# Altium PCB УШЯИ 758723.275.PcbDoc
Units mm, origin at the board's own origin, x right, y up, seen from the top; angles counter-clockwise.
Board outline 220 x 50 mm, 2 copper layers (Top Layer, Top, Bottom Layer, Bottom), stack 1.571 mm thick; 59 components, 42 nets, 232 pads, 44 vias.
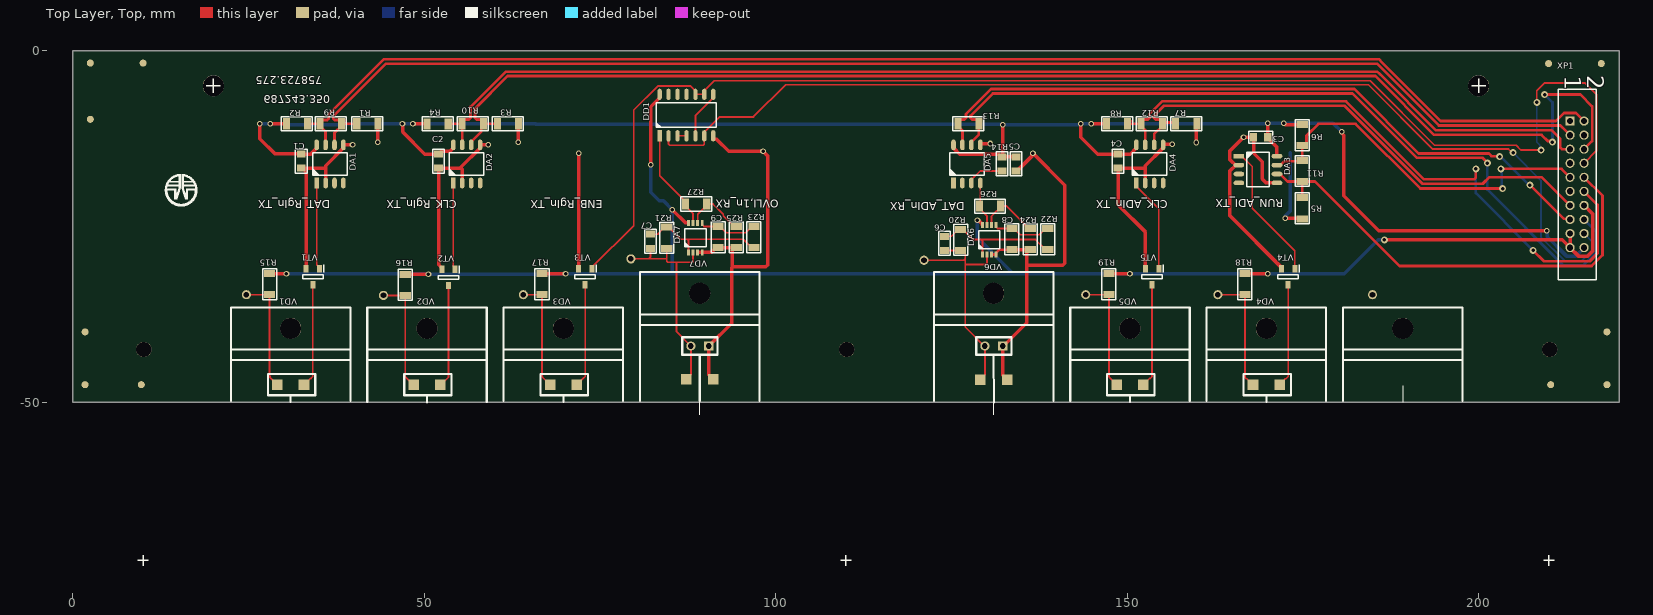
[diagram p0: Top Layer, Top view]
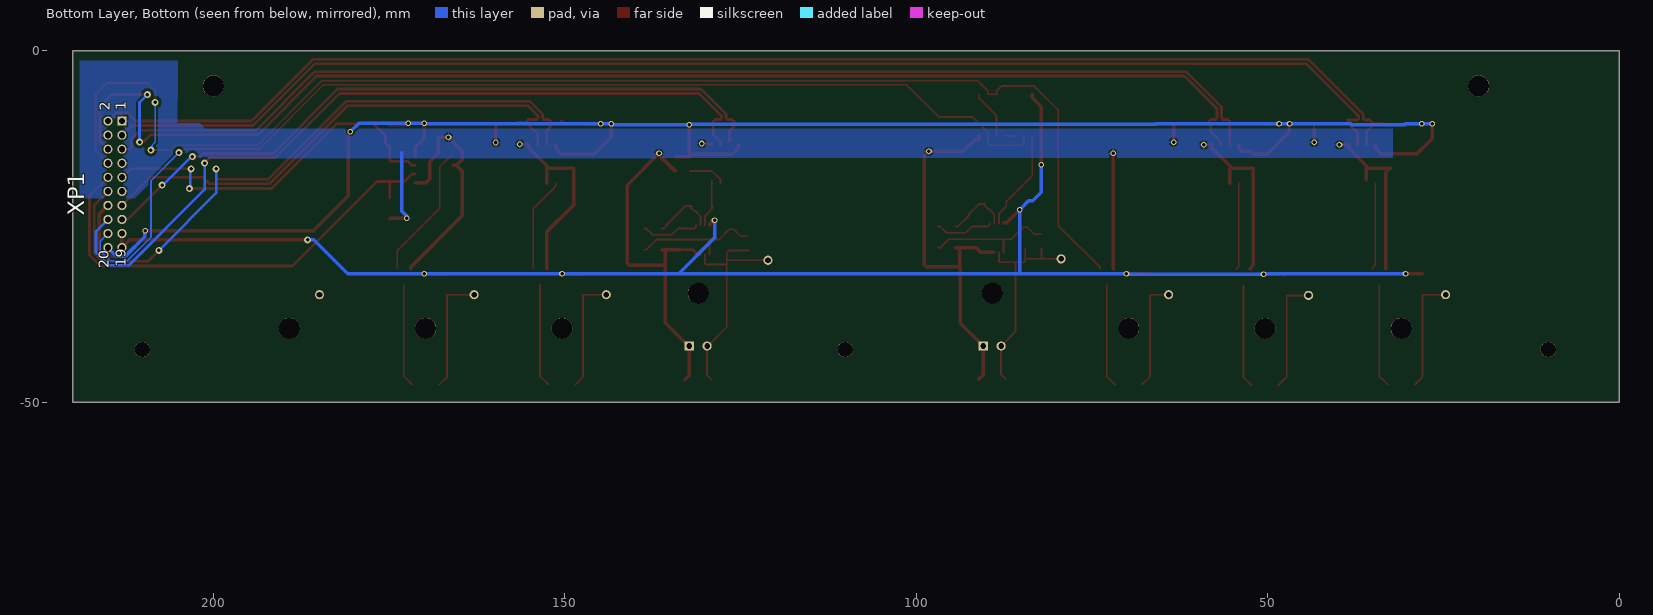
[diagram p1: Bottom Layer, Bottom view, seen from below]
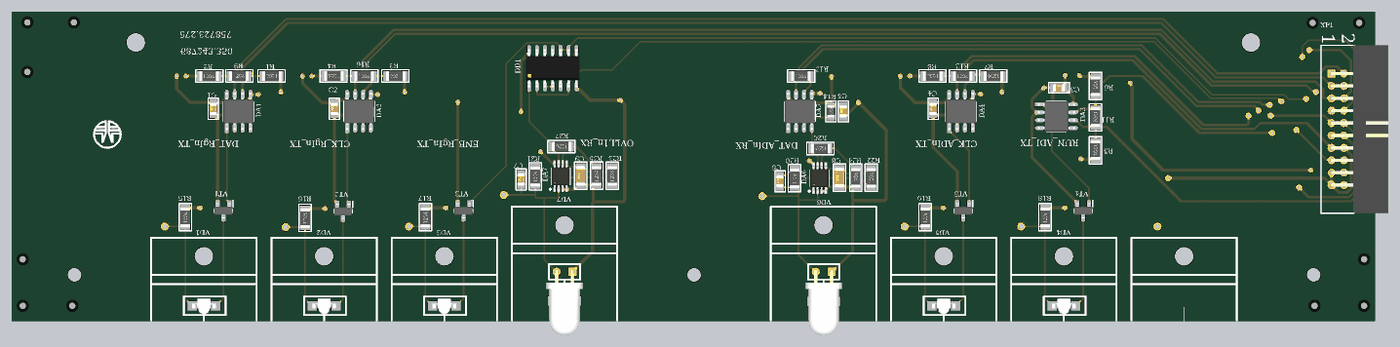
[diagram p2: 3D render of the assembled board from above, using the file's embedded part models]

## Layer stack, top to bottom
Top Solder, Top Mask: solder mask 0.0102, Solder Resist, Dk 3.5
Top Layer, Top: signal copper 0.0356
Dielectric 1: dielectric 1.5, FR-4, Dk 4.8
Bottom Layer, Bottom: signal copper 0.0356
Bottom Solder, Bot Mask: solder mask 0.0102, Solder Resist, Dk 3.5

## Board outline
0,-50 0,0 220,0 220,-50

## Design rules (kind name [scope] priority, off if disabled: settings)
Clearance [All] p1: gap=0.15 ignorepadtopadclearanceinfootprint=FALSE except(0.2: Arc-Via Track-Via)
DiffPairsRouting [All] p1: maxlimit=0.254 minlimit=0.254 mostfreqgap=0.254 toplayer_minwidth=0.381 toplayer_maxwidth=0.381 toplayer_prefwidth=0.381 bottomlayer_minwidth=0.381 bottomlayer_maxwidth=0.381 bottomlayer_prefwidth=0.381 maxuncoupledlength=12.7
HoleSize [All] p1: absolutevalues=TRUE maxlimit=8 minlimit=0.25 maxpercent=80.000 minpercent=20.000
HoleToHoleClearance [All] p1: gap=0.2 allowstackedmicrovias=TRUE
MinimumSolderMaskSliver [All] p1: minsoldermaskwidth=0.001
NetAntennae [All] p1: netantennaetolerance=2
PlaneClearance [All] p1: clearance=0.254
PolygonConnect [All] p1: connectstyle=Relief reliefconductorwidth=0.254 reliefentries=4 polygonreliefangle="90 Angle" airgapwidth=0.254
RoutingVias [All] p1: holewidth=0.5 width=0.8 viastyle="Through Hole" minholewidth=0.5 minwidth=0.8 maxholewidth=0.5 maxwidth=2
ShortCircuit [All] p1: allowed=TRUE
SilkToSilkClearance [All] p1: silktosilkclearance=0.1
SilkToSolderMaskClearance [IsPad] p1: minsilkscreentomaskgap=0.1 clearancetoexposedcopper=TRUE
SolderMaskExpansion [All] p1: expansion=0.102 istentingtop=FALSE
UnConnectedPin [All] p1:
UnRoutedNet [All] p1: checkbadconnections=TRUE
Width [All] p1: maxlimit=5 minlimit=0.15 preferedwidth=0.3 minimp=50.000000 maximp=50.000000 favimp=50.000000
20 further rules are at their usual default settings.

## Classes and differential pairs
net class R19_Nets: +5Vn NetR19_1
net class R18_Nets: +5Vn NetR18_1
net class R17_Nets: +5Vn NetR17_1
net class R16_Nets: +5Vn NetR16_1
net class R15_Nets: +5Vn NetR15_1
net class R6_Nets: +3.3Vn RUN_ADI_n
net class R5_Nets: GNDn RUN_ADI_p
net class R4_Nets: +3.3Vn CLK_RgI_n
net class R3_Nets: CLK_RgI_p GNDn
net class R2_Nets: +3.3Vn DAT_RgI_n
net class R1_Nets: DAT_RgI_p GNDn
net class VT5_Nets: CLK_ADIn GNDn NetVD5_2
net class VT4_Nets: GNDn NetVD4_2 RUN_ADIn
net class VT3_Nets: ENB_RgIn GNDn NetVD3_2
net class VT2_Nets: CLK_RgIn GNDn NetVD2_2
net class VT1_Nets: DAT_RgIn GNDn NetVD1_2
net class VD7_Nets: GNDn NetC7_1
net class VD6_Nets: GNDn NetC6_1
net class VD5_Nets: NetR19_1 NetVD5_2
net class VD4_Nets: NetR18_1 NetVD4_2
net class VD3_Nets: NetR17_1 NetVD3_2
net class VD2_Nets: NetR16_1 NetVD2_2
net class VD1_Nets: NetR15_1 NetVD1_2
net class R27_Nets: NetDA7_6 NetDA7_7
net class R26_Nets: DAT_ADIn NetDA6_6
net class R25_Nets: GNDn NetDA7_6
net class R24_Nets: GNDn NetDA6_6
net class R23_Nets: NetC7_2 NetC9_2
net class R22_Nets: NetC6_2 NetC8_2
net class R21_Nets: NetC7_1 NetC7_2
net class R20_Nets: NetC6_1 NetC6_2
net class R8_Nets: +3.3Vn CLK_ADI_n
net class R7_Nets: CLK_ADI_p GNDn
net class DA7_Nets: +5Vn GNDn NetC7_1 NetC7_2 NetC9_2 NetDA7_6 NetDA7_7
net class C9_Nets: GNDn NetC9_2
net class C8_Nets: GNDn NetC8_2
net class C7_Nets: NetC7_1 NetC7_2
net class C6_Nets: NetC6_1 NetC6_2
net class DA6_Nets: +5Vn DAT_ADIn GNDn NetC6_1 NetC6_2 NetC8_2 NetDA6_2_4 NetDA6_6
net class XP1_Nets: +3.3Vn +5Vn CLK_ADI_n CLK_ADI_p CLK_RgI_n CLK_RgI_p DAT_ADI_n DAT_ADI_p DAT_RgI_n DAT_RgI_p ENB_RgIn GNDn OVLI,1n RUN_ADI_n RUN_ADI_p
net class R14_Nets: +3.3Vn NetDA5_3
net class R13_Nets: DAT_ADI_n DAT_ADI_p
net class R12_Nets: CLK_ADI_n CLK_ADI_p
net class R11_Nets: RUN_ADI_n RUN_ADI_p
net class R10_Nets: CLK_RgI_n CLK_RgI_p
net class R9_Nets: DAT_RgI_n DAT_RgI_p
net class DD1_Nets: +5Vn ENB_RgIn GNDn NetDA7_7 NetDD1_3 NetDD1_5 NetDD1_7 NetDD1_8 NetDD1_10 NetDD1_11 NetDD1_12 NetDD1_13 NetDD1_14 OVLI,1n
net class DA5_Nets: +3.3Vn DAT_ADI_n DAT_ADI_p DAT_ADIn GNDn NetDA5_1 NetDA5_2 NetDA5_3
net class DA4_Nets: +3.3Vn CLK_ADI_n CLK_ADI_p CLK_ADIn GNDn NetDA4_3 NetDA4_4
net class DA3_Nets: +3.3Vn GNDn NetDA3_3 NetDA3_4 RUN_ADI_n RUN_ADI_p RUN_ADIn
net class DA2_Nets: +3.3Vn CLK_RgI_n CLK_RgI_p CLK_RGIn GNDn NetDA2_3 NetDA2_4
net class DA1_Nets: +3.3Vn DAT_RgI_n DAT_RgI_p DAT_RgIn GNDn NetDA1_3 NetDA1_4
net class C5_Nets: +3.3Vn GNDn
net class C4_Nets: +3.3Vn GNDn
net class C3_Nets: +3.3Vn GNDn
net class C2_Nets: +3.3Vn GNDn
net class C1_Nets: +3.3Vn GNDn
differential pair RUN_ADI: +RUN_ADI_p -RUN_ADI_n
differential pair DAT_RgI: +DAT_RgI_p -DAT_RgI_n
differential pair DAT_ADI: +DAT_ADI_p -DAT_ADI_n
differential pair CLK_RgI: +CLK_RgI_p -CLK_RgI_n
differential pair CLK_ADI: +CLK_ADI_p -CLK_ADI_n

## Components (designator, comment, footprint, x,y, rotation, side; value= is the part's Value field where it differs from the comment)
C1 "0805-X7R-25 В-0,1 мкФ +-10%" "CAP: 0805" 32.5,-15.7 r90 top value="0,1 мкФ"
C2 "0805-X7R-25 В-0,1 мкФ +-10%" "CAP: 0805" 52.04,-15.7 r90 top value="0,1 мкФ"
C3 "0805-X7R-25 В-0,1 мкФ +-10%" "CAP: 0805" 169,-12.3 r0 top value="0,1 мкФ"
C4 "0805-X7R-25 В-0,1 мкФ +-10%" "CAP: 0805" 148.7,-15.7 r90 top value="0,1 мкФ"
C5 "0805-X7R-25 В-0,1 мкФ +-10%" "CAP: 0805" 134.2,-16.1 r90 top value="0,1 мкФ"
C6 "0805-NP0-50 В-2,4 пФ-1%" "CAP: 0805" 124,-27.4 r90 top value="2,1 мкФ"
C7 "0805-NP0-50 В-2,4 пФ-1%" "CAP: 0805" 82.2,-27.1 r90 top value="2,1 мкФ"
C8 "1206-С0G-50 B-56 пФ+-1%" "CAP: 1206" 133.6,-26.8 r90 top value="56 пФ"
C9 "1206-С0G-50 B-56 пФ+-1%" "CAP: 1206" 91.8,-26.5 r90 top value="56 пФ"
DA1 "SN65HVD75D" 8-SOIC 36.599,-16.1 r90 top
DA2 "SN65HVD75D" 8-SOIC 56.04,-16.1 r90 top
DA3 "SN65HVD75D" 8-SOIC 168.6,-16.899 r0 top
DA4 "SN65HVD75D" 8-SOIC 153.2,-16.1 r90 top
DA5 "SN65HVD75D" 8-SOIC 127.2,-16.1 r90 top
DA6 "ADA4807-2ARMZ" 8-MSOP 129.4,-28.99 r0 top
DA7 "ADA4807-2ARMZ" 8-MSOP 87.6,-28.69 r0 top
DD1 "IN74HC00AD" 14-soic 83.49,-12.1 r90 top
R1 "1206-1 кОм+-5%" 1206 41.9,-10.4 r180 top value="1 кОм"
R2 "1206-1 кОм+-5%" 1206 31.875,-10.4 r0 top value="1 кОм"
R3 "1206-1 кОм+-5%" 1206 61.9,-10.4 r180 top value="1 кОм"
R4 "1206-1 кОм+-5%" 1206 51.915,-10.402 r180 top value="1 кОм"
R5 "1206-1 кОм+-5%" 1206 174.9,-22.4 r270 top value="1 кОм"
R6 "1206-1 кОм+-5%" 1206 174.9,-12 r90 top value="1 кОм"
R7 "1206-1 кОм+-5%" 1206 158.4,-10.4 r180 top value="1 кОм"
R8 "1206-1 кОм+-5%" 1206 148.575,-10.4 r180 top value="1 кОм"
R9 "1206-100 Ом+-5%" 1206 36.7,-10.4 r0 top value="100 Ом"
R10 "1206-100 Ом+-5%" 1206 56.9,-10.4 r0 top value="100 Ом"
R11 "1206-100 Ом+-5%" 1206 174.9,-17.1 r270 top value="100 Ом"
R12 "1206-100 Ом+-5%" 1206 153.5,-10.4 r0 top value="100 Ом"
R13 "1206-100 Ом+-5%" 1206 127.4,-10.4 r0 top value="100 Ом"
R14 "0805-10 KОМ+-5%" 0805 132.2,-16.1 r90 top value="10 кОм"
R15 "1206-30 Ом+-5%" 1206 28,-33.199 r90 top value="30 Ом"
R16 "1206-30 Ом+-5%" 1206 47.3,-33.299 r90 top value="30 Ом"
R17 "1206-30 Ом+-5%" 1206 66.75,-33.2 r90 top value="30 Ом"
R18 "1206-30 Ом+-5%" 1206 166.75,-33.2 r90 top value="30 Ом"
R19 "1206-30 Ом+-5%" 1206 147.4,-33.2 r90 top value="30 Ом"
R20 "1206-5,23 кОм+-1%" 1206 126.3,-26.9 r90 top value="5,23 кОм"
R21 "1206-5,23 кОм+-1%" 1206 84.5,-26.6 r90 top value="5,23 кОм"
R22 "1206-140 Ом+-1%" 1206 138.7,-26.8 r90 top value="140 Ом"
R23 "1206-140 Ом+-1%" 1206 96.9,-26.5 r90 top value="140 Ом"
R24 "1206-102 Ом+-1%" 1206 136.2,-26.8 r90 top value="102 Ом"
R25 "1206-102 Ом+-1%" 1206 94.4,-26.5 r90 top value="102 Ом"
R26 "1206-215 Ом+-1%" 1206 130.49,-22.1 r180 top value="215 Ом"
R27 "1206-215 Ом+-1%" 1206 88.69,-21.8 r180 top value="215 Ом"
VD1 "VSMY2853RG" VSMY2853G 31,-47.5 r180 top
VD2 "VSMY2853RG" VSMY2853G 50.4,-47.5 r180 top
VD3 "VSMY2853RG" VSMY2853G 69.8,-47.5 r180 top
VD4 "VSMY2853RG" VSMY2853G 169.8,-47.5 r180 top
VD5 "VSMY2853RG" VSMY2853G 150.405,-47.5 r180 top
VD6 "SFH203" SFH203 131.03,-42 r180 top
VD7 "SFH203" SFH203 89.2,-42 r180 top
VT1 "BSS138BK" SOT-23-3 35.1,-30.999 r270 top
VT2 "BSS138BK" SOT-23-3 54.4,-31.099 r270 top
VT3 "BSS138BK" SOT-23-3 73.85,-31 r270 top
VT4 "BSS138BK" SOT-23-3 173.85,-31 r270 top
VT5 "BSS138BK" SOT-23-3 154.5,-31 r270 top
XP1 "BH2-20R" BH2-20R 213,-10 r270 top
? "Comment" VSMY2853G 131.03,-46.8 r180 top
? "Comment" VSMY2853G 89.2,-46.7 r180 top

## Footprints (in the part's own frame and the unit in brackets; to place one, negate y for a bottom-side part, rotate by r counter-clockwise, add the part's x,y. Pads: shape width x height; smd on the part's side, far side on the other; paste and mask are expansions set on the pad)
8-MSOP [mm] "pitch 0.65 mm"
  rect 0.42x0.89 smd: 1(0,0) 2(0.65,0) 3(1.3,0) 4(1.95,0) 5(1.95,4.19) 6(1.3,4.19) 7(0.65,4.19) 8(0,4.19)
  round 0.5 on Mech1: 6(-0.1,0.1)
  round 0.5 on Top Overlay: ""(-0.7,0)
  silkscreen extent -0.53,0.8 2.5,3.4, body extent -0.53,-0.35 2.48,4.55, height 1.15
8-SOIC [mm] "Body 3.9mmx4.9mm 1.27 pitch"
  rect 1.525x0.65 smd: 1(-2.712,1.905)
  oval 1.525x0.65 smd: 2(-2.712,0.635) 3(-2.712,-0.635) 4(-2.712,-1.905) 5(2.712,-1.905) 6(2.712,-0.635) 7(2.712,0.635) 8(2.712,1.905)
  silkscreen extent -1.6,-2.45 1.6,2.45, body extent -3,-2.45 3,2.45, height 1.75
14-soic [mm] "Body 8.6x3.9mm, pitch 1.27 mm"
  rect 1.6x0.6 smd: 1(0,0)
  rrect100% 1.6x0.6 smd: 2(0,-1.27) 3(0,-2.54) 4(0,-3.81) 5(0,-5.08) 6(0,-6.35) 7(0,-7.62) 8(5.9,-7.62) 9(5.9,-6.35) 10(5.9,-5.08) 11(5.9,-3.81) 12(5.9,-2.54) 13(5.9,-1.27) 14(5.9,0)
  round 0.5 on Mech13: ""(0.5,0)
  silkscreen extent 1.2,-8.05 4.7,0.45, body extent -0.12,-8.15 6.02,0.55, height 1.78
0805 [mm] "Resistor SMD"
  rect 1x1.25 smd: 1(-1,0) 2(1,0)
  silkscreen extent -1.7,-0.82 1.7,0.82, body extent -1,-0.6 1,0.6, height 0.44
1206 [mm] "Resistor SMD"
  rect 1x1.6 smd: 1(-1.5,0) 2(1.5,0)
  silkscreen extent -2.2,-1 2.2,1, body extent -1.65,-0.8 1.55,0.8, height 0.47
BH2-20R [mm]
  rect 1.3x1.3 hole 0.9: 1(0,0)
  round 1.3 hole 0.9: 2(0,2) 3(2,0) 4(2,2) 5(4,0) 6(4,2) 7(6,0) 8(6,2) 9(8,0) 10(8,2) 11(10,0) 12(10,2) 13(12,0) 14(12,2) 15(14,0) 16(14,2) 17(16,0) 18(16,2) 19(18,0) 20(18,2)
  silkscreen extent -4.55,-1.7 22.55,3.7, body extent -4.55,-0.25 22.55,9.12, height 5.4
"CAP: 0805" [mm]
  rect 1x1.25 smd: 1(-1,0) 2(1,0)
  silkscreen extent -1.7,-0.82 1.7,0.82, body extent -1,-0.62 1,0.63, height 0.78
"CAP: 1206" [mm]
  rect 1x1.6 smd: 1(-1.5,0) 2(1.5,0)
  silkscreen extent -2.2,-1 2.2,1, body extent -1.6,-0.8 1.6,0.8, height 1
SFH203 [mm]
  rect 1.3x1.3 hole 0.8: 1(-1.27,0)
  round 1.3 hole 0.8: 2(1.27,0)
  silkscreen extent -2.5,-1.25 2.5,9.75, body extent -2.93,-0.25 2.93,10.25, height 5.84
SOT-23-3 [mm]
  rect 1.05x0.7 smd: 1(0,0) 2(0,-1.9) 3(2.3,-0.95)
  silkscreen extent -0.53,-2.41 1.43,0.6, body extent -0.05,-2.41 2.35,0.51, height 1.2
VSMY2853G [mm]
  rect 1.5x1.5 smd: 1(1.901,0) 2(-1.895,0)
  silkscreen extent -3.5,-1.5 3.25,2.45, body extent -1.9,-1.17 1.9,1.38, height 2.25

## Part data
DA6 DA7: "3.1 nV/√Hz, 1 mA, 180 MHz, / Rail-to-Rail Input/Output Amplifiers"
DD1: "Quad 2-Input NAND Gate High-Performance Silicon-Gate CMOS."
VD1 VD2 VD3 VD4 VD5: "High Speed Infrared Emitting Diodes, 850 nm, / Surface Emitter Technology"
VD6 VD7: "Silicon PIN Photodiode"
VT1 VT2 VT3 VT4 VT5: "60 V, 360 mA N-channel Trench MOSFET"
XP1: "pitch 2mm, 20 pin 2x10", System=Connector
R1 R2 R3 R4 R5 R6 R7 R8 R9 R10 R11 R12 R13 R15 R16 R17 R18 R19 R20 R21 R22 R23 R24 R25 R26 R27: ModelPrint=1206
R14: ModelPrint=0805

## Free pads (board coordinates)
  round 2.2 hole 2.2 unplated: 0(10.102,-42.5) 0(110.102,-42.5) 0(210.102,-42.5)
  round 3 hole 3 unplated: 0(20,-5) 0(200,-5) ""(31,-39.5) ""(50.4,-39.5) ""(69.8,-39.5) ""(89.2,-34.5) ""(131,-34.5) ""(150.4,-39.5) ""(169.8,-39.5) ""(189.2,-39.5)
  round 1.3 hole 0.8: 1(24.7,-34.699) 4(44.2,-34.799) 5(64.1,-34.7) 7(79.4,-29.6) 8(121.1,-29.8) 9(144.1,-34.7) 10(162.9,-34.7) 11(184.9,-34.7)
  round 1 smd mask+0.5: R1(1.75,-47.502) R1(1.75,-40) R1(2.498,-9.75) R1(2.498,-1.75) R1(9.75,-47.502) R1(10,-1.75) R1(209.949,-1.822) R1(210.25,-47.502) R1(217.451,-1.822) R1(218.25,-47.502) R1(218.25,-40)

## Via types
v1: diameter 0.8, hole 0.5, Top Layer, Top to Bottom Layer, Bottom, 31 vias
v2: diameter 1, hole 0.5, Top Layer, Top to Bottom Layer, Bottom, 13 vias

## Nets (pads, with @x,y where several pads share a name; then routed paths per layer and width w, separated by ;. In a path a pad name is that pad's centre, name@x,y a point inside that pad or via, vN(x,y) a via of type N, cw(c..) or ccw(c..) an arc to the next point about the centre after c; other vN are vias at no path point)
+3.3Vn: C1.2 C2.2 C3.2 C4.2 C5.2 DA1.8 DA2.8 DA3.8 DA4.8 DA5.8 R2.1 R4.2 R6.2 R8.2 R14.2 XP1.20 | length 265.3
  Top Layer, Top w0.5: v1(26.6,-10.4) 26.6,-12.5 28.769,-14.669 32.469,-14.669 C1.2 33.82,-14.7 34.694,-13.826 DA1.8 ; v1(28.1,-10.4) R2.1 ; v1(46.9,-10.4) 46.924,-10.424 46.924,-11.55 50.074,-14.7 C2.2 52.413,-14.327 53.634,-14.327 54.135,-13.826 DA2.8 ; v1(48.4,-10.402) R4.2 ; DA5.8 125.295,-13.826 126.196,-14.727 131.827,-14.727 R14.2 ; v1(132.3,-10.5) 132.3,-15 R14.2 ; C5.2 R14.2 ; v1(143.4,-10.4) 143.4,-12.3 145.8,-14.7 C4.2 150.42,-14.7 151.295,-13.826 DA4.8 ; v1(144.9,-10.4) R8.2 ; v1(170,-10.3) C3.2 170,-12.425 171.312,-13.737 DA3.8 ; v1(172.3,-10.3) 172.5,-10.5 R6.2 ; v1(180.5,-11.525) 180.5,-11.734 180.8,-12.034 180.8,-20.6 185.8,-25.6 v1(209.7,-25.6)
  Bottom Layer, Bottom w0.5: v1@26.643,-10.4 v1(28.1,-10.4) 30.435,-10.4 30.535,-10.5 38.115,-10.5 38.215,-10.4 v1(46.9,-10.4) 65.85,-10.4 65.9,-10.45 132.25,-10.45 v1(132.3,-10.5) 143.219,-10.5 143.319,-10.4 v1(144.9,-10.4) 169.9,-10.4 v1(170,-10.3) ; v1@170.1,-10.3 179.275,-10.3 v1(180.5,-11.525) ; v1(209.7,-25.6) 209.757,-25.657 209.757,-26.454 212.503,-29.2 213.8,-29.2 XP1.20
+5Vn: DA6.8 DA7.8 DD1.14 R15.2 R16.2 R17.2 R18.2 R19.2 XP1.14 XP1.17 XP1.19 | length 254.9
  Top Layer, Top w0.372: DA7.8@87.536,-24.5 DA7.8
  Top Layer, Top w0.5: R15.2 v1(30.4,-31.699) ; R16.2@47.646,-31.845 47.693,-31.799 v1(50.6,-31.799) ; R17.2 v1(70.1,-31.7) ; v1(82.2,-16.192) 82.2,-7.99 83.49,-6.7 DD1.14 ; v1(85.3,-22.6) 87.2,-24.5 DA7.8@87.536,-24.5 ; v1(128.7,-24.1) 128.757,-24.157 128.912,-24.157 129.4,-24.645 DA6.8 ; R19.2 v1(150.4,-31.7) ; R18.2 v1(170,-31.7) ; v2(186.6,-26.9) 211.9,-26.9 XP1.19 ; XP1.17 XP1.19 ; XP1.14 216.2,-23.2 216.2,-28.497 215.497,-29.2 214.2,-29.2 XP1.19
  Bottom Layer, Bottom w0.5: v1(30.4,-31.699) 50.419,-31.699 v1@50.519,-31.799 ; v1(50.6,-31.799) v1@50.519,-31.799 ; v1(70.1,-31.7) v1@70.019,-31.7 ; v1(82.2,-16.192) 82.2,-20.117 83.413,-21.33 84.03,-21.33 v1(85.3,-22.6) 85.3,-31.589 85.189,-31.7 ; v1(128.7,-24.1) 128.7,-26.599 133.801,-31.7 ; v2(186.6,-26.9) 185.7,-26.9 180.9,-31.7 v1(170,-31.7) v1(150.4,-31.7) 133.801,-31.7 ; v1@50.519,-31.799 69.92,-31.799 v1@70.019,-31.7 ; v1@70.019,-31.7 85.189,-31.7 ; 85.189,-31.7 133.801,-31.7
CLK_ADI_n: DA4.7 R8.1 R12.1 XP1.12 | length 96.6
  Top Layer, Top w0.381: DA4.7 152.565,-11.265 152,-10.7 R12.1 ; v2(199.6,-16.8) 199.6,-18.061 199.377,-18.284 192.25,-18.284 181.154,-7.188 154.983,-7.188 153.183,-8.989 153.183,-9.567 152.959,-9.791 152.31,-9.791 152,-10.1 R12.1 ; v2(207.75,-28.411) 209.28,-29.94 215.804,-29.94 216.941,-28.804 216.941,-21.94 XP1.12 ; R8.1 150.475,-10 R8.1 ; R8.1 R12.1
  Bottom Layer, Bottom w0.381: v2(199.6,-16.8) 199.6,-20.261 v2(207.75,-28.411)
CLK_ADI_p: DA4.6 R7.2 R12.2 XP1.13 | length 74.3
  Top Layer, Top w0.381: DA4.6 153.835,-11.865 155,-10.7 R12.2 155.2,-10.2 155.6,-10.2 ; R7.2 156.7,-10.2 155.6,-10.2 ; XP1.13 208.975,-17.975 201.53,-17.975 200.585,-18.919 191.987,-18.919 180.891,-7.823 155.246,-7.823 153.818,-9.252 153.818,-9.567 154.041,-9.791 155.191,-9.791 155.6,-10.2
CLK_ADIn: DA4.1 VT5.1 | length 13.5
  Top Layer, Top w0.254: DA4.1 151.295,-19.25 154.5,-22.455 VT5.1
CLK_RgI_n: DA2.7 R4.1 R10.1 XP1.5 | length 171.9
  Top Layer, Top w0.381: R4.1 55.398,-10.402 R10.1 55.402,-10.402 55.402,-12.951 55.405,-12.953 DA2.7 ; R10.1@55.402,-10.285 55.402,-10.098 55.709,-9.79 56.359,-9.79 56.582,-9.567 56.582,-7.985 61.602,-2.965 185.563,-2.965 185.935,-3.337 193.914,-11.316 210.408,-11.316 211.626,-12.534 211.626,-13.777 211.849,-14 XP1.5
CLK_RgI_p: DA2.6 R3.2 R10.2 XP1.6 | length 189.1
  Top Layer, Top w0.381: DA2.6 56.675,-12.951 58.09,-11.535 58.09,-10.709 R10.2 ; R3.2 R10.2 ; v2(209.387,-6.223) 214.466,-6.223 216.141,-7.897 216.141,-12.859 XP1.6 ; v2(210.5,-13) 210.33,-12.83 209.83,-12.83 208.951,-11.951 193.651,-11.951 185.3,-3.6 61.865,-3.6 57.217,-8.248 57.217,-9.567 57.441,-9.79 58.09,-9.79 58.4,-10.1 R10.2
  Bottom Layer, Bottom w0.381: v2(209.387,-6.223) 210.5,-7.336 v2(210.5,-13)
CLK_RgIn: DA2.1 VT2.1 | length 12.4
  Top Layer, Top w0.254: DA2.1 54.135,-30.659 54.4,-30.924 VT2.1
DAT_ADI_n: DA5.7 R13.1 XP1.15 | length 100.2
  Top Layer, Top w0.381: DA5.7@126.565,-12.951 126.565,-11.365 125.9,-10.7 R13.1 125.9,-10.1 126.21,-9.791 126.859,-9.791 127.082,-9.567 127.082,-8.989 130.623,-5.448 182.309,-5.448 191.466,-14.605 201.449,-14.605 201.839,-14.995 202.946,-14.995 v2(203,-15.049) ; v2(207.3,-19.1) 212.117,-23.917 212.917,-23.917 XP1.15
  Bottom Layer, Bottom w0.381: v2(203,-15.049) 203.125,-15.049 207.175,-19.1 v2(207.3,-19.1)
DAT_ADI_p: DA5.6 R13.2 XP1.16 | length 114.3
  Top Layer, Top w0.381: DA5.6 127.835,-12.951 128.9,-11.885 R13.2 128.9,-10.1 128.59,-9.791 127.941,-9.791 127.717,-9.567 127.717,-9.252 130.886,-6.083 182.046,-6.083 191.203,-15.24 200.585,-15.24 201.234,-15.889 v2(201.234,-15.982)
  Bottom Layer, Bottom w0.381: v2(201.234,-15.982) 201.234,-19.762 211.967,-30.494 214.902,-30.494 216.695,-28.702 216.695,-25.695 XP1.16
DAT_ADIn: DA5.4 DA6.7 R26.2 | length 7.2
  Top Layer, Top w0.254: R26.2 R26.2@128.99,-22.4 ; DA5.4@129.105,-18.375 DA5.4 129.105,-22.285 R26.2@128.99,-22.4 ; DA6.7 130.05,-23.46 R26.2@128.99,-22.4
DAT_RgI_n: DA1.7 R2.2 R9.1 XP1.2 | length 193.8
  Top Layer, Top w0.381: R2.2 R9.1 ; DA1.7 35.964,-11.464 35.2,-10.7 R9.1 ; XP1.2 213.86,-8.859 212.147,-8.859 211.006,-10 194.598,-10 186.284,-1.686 185.793,-1.195 44.268,-1.195 36.404,-9.059 36.404,-9.638 36.181,-9.861 35.51,-9.861 35.2,-10.171 R9.1
DAT_RgI_p: DA1.6 R1.2 R9.2 XP1.3 | length 191.4
  Top Layer, Top w0.381: DA1.6 37.234,-11.666 38.2,-10.7 R9.2 R9.2@38.6,-10.4 ; R1.2 R9.2@38.6,-10.4 ; XP1.3 211.86,-10.86 211.86,-10.858 211.636,-10.635 194.335,-10.635 185.53,-1.83 44.531,-1.83 37.039,-9.322 37.039,-9.638 37.262,-9.861 38.6,-9.861 R9.2@38.6,-10.4
DAT_RgIn: DA1.1 VT1.1 | length 12.4
  Top Layer, Top w0.254: DA1.1 34.694,-30.418 35.1,-30.824 VT1.1
ENB_RgIn: DD1.9 DD1.10 VT3.1 XP1.8 | length 190.3
  Top Layer, Top w0.254: VT3.1 73.85,-30.825 79.8,-24.875 79.8,-8.427 83.208,-5.019 87.889,-5.019 88.57,-5.7 DD1.10 DD1.9 89.84,-5.7 91.263,-4.277 184.56,-4.277 193.717,-13.433 205.34,-13.433 206.032,-14.125 v2(208.9,-14.125) ; v2(208.277,-7.333) 208.277,-5.672 209.349,-4.6 215.15,-4.6 216.758,-6.208 216.758,-14.242 XP1.8
  Bottom Layer, Bottom w0.254: v2(208.277,-7.333) 208.277,-12.977 208.706,-13.406 208.706,-13.931 v2(208.9,-14.125)
GNDn: ?.2 C1.1 C2.1 C3.1 C4.1 C5.1 C8.1 C9.1 DA1.2 DA1.5 DA2.2 DA2.5 DA3.2 DA3.5 DA4.2 DA4.5 DA5.5 DA6.3 DA6.4 DA7.3 DA7.4 DD1.7 R1.1 R3.1 R5.2 R7.1 R24.1 R25.1 VD6.1 VD7.1 VT1.2 VT2.2 VT3.2 VT4.2 VT5.2 XP1.1 XP1.4 XP1.7 XP1.11 | length 259
  Top Layer, Top w0.25: R1.1@43.4,-11.2 R1.1
  Top Layer, Top w0.372: DA7.3 DA7.3@88.964,-28.69 ; DA6.3 DA6.4 131.35,-28.755 131.805,-28.3 C8.1
  Top Layer, Top w0.5: C1.1 C1.1@32.625,-16.7 ; VT1.2 33.2,-17.275 C1.1@32.625,-16.7 ; DA1.2@35.964,-18.375 35.964,-16.7 ; v1(39.8,-13.388) DA1.5 38.504,-13.826 35.964,-16.366 35.964,-16.7 ; v1(43.4,-13.026) R1.1@43.4,-11.2 ; VT2.2 52.5,-30.924 52.04,-30.464 C2.1 55.256,-16.7 ; DA2.2 55.405,-16.849 55.256,-16.7 ; v1(59.1,-13.388) DA2.5 57.945,-13.826 55.256,-16.514 55.256,-16.7 ; v1(63.4,-13) R3.1 ; VT3.2 71.95,-14.65 v1(72,-14.6) ; DA7.3@88.964,-28.69 DA7.4 90.81,-28.69 91.5,-28 C9.1 R25.1@94.1,-28 ; ?.2@91.095,-46.7 90.47,-46.074 VD7.1 93.727,-38.743 93.727,-30.835 93.85,-30.712 ; DD1.7 91.11,-12.573 91.156,-12.619 91.629,-12.619 93.31,-14.3 v1(98.2,-14.3) 98.9,-15 98.9,-30.419 98.607,-30.712 93.85,-30.712 ; R25.1 R25.1@94.1,-28 ; DA5.5 129.105,-13.383 129.287,-13.2 v1(130.5,-13.2) ; ?.2@132.925,-46.8 132.3,-46.174 132.3,-42.1 135.69,-38.71 135.69,-30.5 ; C8.1 R24.1@135.94,-28.3 ; C5.1 134.325,-17.1 136.453,-14.972 136.453,-14.747 v1(136.6,-14.6) 141.125,-19.125 141.125,-30.207 140.832,-30.5 135.69,-30.5 ; R24.1 R24.1@135.94,-28.3 ; DA4.2 152.565,-16.7 ; VT5.2 152.6,-25.787 148.7,-21.888 C4.1 152.565,-16.7 ; v1(156.4,-13.3) 155.193,-13.3 DA4.5 155.105,-13.826 152.565,-16.366 152.565,-16.7 ; v1(159.8,-13.051) 159.8,-10.5 R7.1 ; DA3.2 DA3.2@165.45,-16.264 ; v1(166.555,-12.3) 164.621,-14.234 164.621,-15.528 164.975,-15.882 165.027,-15.882 165.41,-16.264 DA3.2@165.45,-16.264 ; v1@166.744,-12.3 C3.1 168,-14.563 169.236,-15.798 169.236,-18.236 169.804,-18.804 DA3.5 ; VT4.2 171.95,-30.825 164.621,-23.496 164.621,-17.093 DA3.2@165.45,-16.264 ; v1(172.5,-23.8) 172.55,-23.85 174.85,-23.85 R5.2 ; C1.1@32.625,-16.7 35.964,-16.7 ; 93.85,-30.712 93.85,-28.25 R25.1@94.1,-28 ; 135.69,-30.5 135.69,-28.55 R24.1@135.94,-28.3
  Bottom Layer, Bottom w0.5: v1(172.5,-23.8) 172.5,-23.5 173.2,-22.8 173.2,-14.5
NetC6_1: ?.1@129.129,-46.8 C6.1 DA6.2 pad.8 R20.1 VD6.2 | length 33
  Top Layer, Top w0.254: pad.8 126.76,-29.8 126.973,-29.587 ; C6.1@123.875,-28.4 C6.1 R20.1 126.6,-28.4 126.973,-28.773 126.973,-29.587 ; 126.956,-31.655 126.956,-39.296 129.76,-42.1 129.76,-46.169 ?.1@129.129,-46.8 ; 126.973,-31.636 126.973,-30.4 ; DA6.2 130.05,-30.251 129.901,-30.4 126.973,-30.4 ; 126.973,-30.4 126.973,-29.587
NetC6_2: C6.2 DA6.1 R20.2 R22.1 | length 18.5
  Top Layer, Top w0.254: C6.2 125.006,-26.4 125.627,-25.779 125.627,-25.773 126,-25.4 R20.2 126.6,-25.4 128.05,-26.85 129.19,-26.85 ; DA6.1 129.4,-27.06 129.19,-26.85 ; R22.1 138.4,-28.3 136.95,-26.85 129.19,-26.85
NetC7_1: ?.1@87.299,-46.7 C7.1 DA7.2 pad.7 R21.1 VD7.2 | length 31.5
  Top Layer, Top w0.254: pad.7 81.9,-29.6 ; C7.1 82.2,-29.3 81.9,-29.6 ; R21.1 84.5,-29.6 ; ?.1@87.299,-46.7 87.93,-46.069 VD7.2 85.9,-39.97 85.9,-30.1 ; DA7.2 88.25,-30.1 85.9,-30.1 ; 81.9,-29.6 84.5,-29.6 ; 84.5,-29.6 84.5,-29.951 84.649,-30.1 85.9,-30.1
NetC7_2: C7.2 DA7.1 R21.2 R23.1 | length 18.3
  Top Layer, Top w0.254: C7.2 83.206,-26.1 83.468,-25.838 83.468,-25.832 84.2,-25.1 R21.2 84.8,-25.1 86.5,-26.8 87.39,-26.8 ; DA7.1 87.6,-27.01 87.39,-26.8 ; R23.1 96.6,-28 95.4,-26.8 87.39,-26.8
NetC8_2: C8.2 DA6.5 R22.2 | length 8.4
  Top Layer, Top w0.254: DA6.5 131.35,-25.035 131.615,-25.3 C8.2 133.9,-25.3 134.781,-26.181 137.519,-26.181 138.4,-25.3 R22.2
NetC9_2: C9.2 DA7.5 R23.2 | length 8.4
  Top Layer, Top w0.254: DA7.5 89.55,-24.735 89.815,-25 C9.2 92.1,-25 92.981,-25.881 95.719,-25.881 96.6,-25 R23.2
NetDA5_3: DA5.3 R14.1 | length 5.3
  Top Layer, Top w0.254: DA5.3 127.835,-18.375 129.109,-17.1 R14.1
NetDA6_6: DA6.6@130.7,-24.8 R24.2 R26.1 | length 9
  Top Layer, Top w0.254: DA6.6@130.7,-24.8 130.7,-23.538 131.465,-22.773 131.617,-22.773 131.99,-22.4 R26.1 132.871,-22.1 135.527,-24.756 135.527,-24.927 135.9,-25.3 R24.2
NetDA7_6: DA7.6@88.9,-24.5 R25.2 R27.1 | length 9
  Top Layer, Top w0.254: DA7.6@88.9,-24.5 88.9,-23.238 89.665,-22.473 89.817,-22.473 90.19,-22.1 R27.1 91.071,-21.8 92.549,-23.278 92.549,-23.449 94.1,-25 R25.2
NetDA7_7: DA7.7 DD1.1 R27.2 | length 14.4
  Top Layer, Top w0.254: DD1.1 83.49,-17.8 87.19,-21.5 R27.2 87.19,-22.1 88.25,-23.16 DA7.7
NetDD1_3: DD1.3 DD1.4 | length 1.3
  Top Layer, Top w0.254: DD1.3 DD1.4
NetDD1_5: DD1.5 DD1.8 | length 7
  Top Layer, Top w0.254: DD1.5 88.57,-9.24 91.11,-6.7 DD1.8
NetR15_1: pad.1 R15.1 VD1.1 | length 16.6
  Top Layer, Top w0.254: pad.1 R15.1 28,-46.3 28.04,-46.34 28.04,-46.442 VD1.1
NetR16_1: pad.4 R16.1 VD2.1 | length 16.4
  Top Layer, Top w0.254: pad.4 R16.1 47.3,-46.4 VD2.1@48.499,-47.599
NetR17_1: pad.5 R17.1 VD3.1 | length 15.9
  Top Layer, Top w0.254: pad.5 R17.1 66.75,-46.301 66.815,-46.366 66.815,-46.416 VD3.1
NetR18_1: pad.10 R18.1 VD4.1 | length 17.2
  Top Layer, Top w0.254: pad.10 R18.1 166.75,-46.301 166.765,-46.316 166.765,-46.466 166.944,-46.646 167.044,-46.646 VD4.1
NetR19_1: pad.9 R19.1 VD5.1 | length 16.6
  Top Layer, Top w0.254: pad.9 R19.1 147.4,-46.301 147.442,-46.343 147.442,-46.439 VD5.1
NetVD1_2: VD1.2 VT1.3 | length 14.8
  Top Layer, Top w0.254: VD1.2 33.776,-46.619 33.874,-46.619 34.15,-46.344 VT1.3
NetVD2_2: VD2.2 VT2.3 | length 14.7
  Top Layer, Top w0.254: VD2.2@52.295,-47.598 53.45,-46.444 VT2.3
NetVD3_2: VD3.2 VT3.3 | length 14.7
  Top Layer, Top w0.254: VD3.2 72.6,-46.595 72.65,-46.595 72.9,-46.345 VT3.3
NetVD4_2: VD4.2 VT4.3 | length 14.8
  Top Layer, Top w0.254: VD4.2 172.45,-46.745 172.45,-46.645 172.6,-46.645 172.9,-46.345 VT4.3
NetVD5_2: VD5.2 VT5.3 | length 14.8
  Top Layer, Top w0.254: VD5.2 153.182,-46.618 153.277,-46.618 153.55,-46.345 VT5.3
OVLI,1n: DD1.2 DD1.6 XP1.18 | length 155.7
  Top Layer, Top w0.254: DD1.2 84.76,-13.281 84.909,-13.43 89.691,-13.43 89.84,-13.281 89.84,-11.6 92.025,-9.415 96.832,-9.415 101.416,-4.831 184.331,-4.831 193.487,-13.987 204.243,-13.987 204.751,-14.495 v2(204.9,-14.495)
  Bottom Layer, Bottom w0.254: v2(204.9,-14.495) 208.873,-18.468 208.873,-26.527 212.223,-29.877 214.646,-29.877 216.077,-28.446 216.077,-27.077 XP1.18
RUN_ADI_n: DA3.7 R6.1 R11.1 XP1.9 | length 53.4
  Top Layer, Top w0.381: DA3.7 171.822,-16.264 172.387,-15.7 174.8,-15.7 R11.1 R6.1 175.2,-13.5 175.51,-13.19 175.51,-12.09 177.2,-10.4 182.505,-10.4 191.705,-19.6 v2(203.4,-19.6) ; v2(203.159,-16.8) 211.8,-16.8 XP1.9
  Bottom Layer, Bottom w0.381: v2(203.159,-16.8) 203.279,-16.921 203.279,-19.479 v2(203.4,-19.6)
RUN_ADI_p: DA3.6 R5.1 R11.2 XP1.10 | length 66.8
  Top Layer, Top w0.381: DA3.6 171.749,-17.534 172.815,-18.6 R11.2 ; R5.1 R11.2 ; XP1.10 217.622,-20.621 217.622,-29.086 216.086,-30.621 188.73,-30.621 176.708,-18.6 R11.2
RUN_ADIn: DA3.1 VT4.1 | length 19.6
  Top Layer, Top w0.254: DA3.1 166.325,-14.994 167.8,-16.469 167.8,-22.4 173.85,-28.45 VT4.1
pads on no net: DA1.3 DA1.4 DA2.3 DA2.4 DA3.3 DA3.4 DA4.3 DA4.4 DA5.1 DA5.2 DA6. DA6.6@129.3,-28.89 DA7. DA7.6@87.5,-28.59 DD1. DD1.11 DD1.12 DD1.13

## Polygon pours and split planes (outlines as drawn)
GNDn on Bottom Layer, Bottom "Main_GND" (solid, remove dead copper, pour order 0): 205.12,-7.13 205.12,-10.28 205,-10.4 204.9,-10.3 201.975,-10.275 201.171,-11.079 173.321,-11.079 173.3,-11.1 32.221,-11.1 32.221,-15.219 173.2,-15.319 173.25,-15.269 173.267,-15.314 205.489,-15.314 211.175,-21 219,-21 219,-1.4 205.1,-1.4 205.1,-6.992 205.179,-7.071

## Silkscreen, mask and mechanical layers (free items; w line width, h text height)
Top Overlay, Top Silk:
  drawing of 59 lines, arcs and shapes, not listed
  text "758723.275" at 35.5,-3.178 h2 r180
  text "687243.350" at 27.2,-5.9 h2 r180
  text "RUN_ADI_TX" at 172.2,-20.691 h2 r180
  text "OVLI,1n_RX" at 100.4,-20.75 h2 r180
  text "DAT_RgIn_TX" at 36.6,-20.863 h2 r180
  text "CLK_RgIn_TX" at 54.6,-20.874 h2 r180
  text "ENB_RgIn_TX" at 75.4,-20.874 h2 r180
  text "CLK_ADIn_TX" at 155.8,-20.863 h2 r180
  text "DAT_ADIn_RX" at 126.89,-21.091 h2 r180
Mechanical 1, Top Assy:
  lines w0.2: 0,-50 220,-50 220,0 0,0 0,-50 ; 0.102,-78.5 20.102,-78.5 20.102,-36.5 0.102,-36.5 0.102,-78.5 ; 100.102,-78.5 120.102,-78.5 120.102,-36.5 100.102,-36.5 100.102,-78.5 ; 200.102,-78.5 220.102,-78.5 220.102,-36.5 200.102,-36.5 200.102,-78.5
  lines w0.3: 22.5,-56.5 39.5,-56.5 ; 31,-78.4 31,-36.7 ; 41.9,-56.5 58.9,-56.5 ; 50.4,-78.4 50.4,-36.7 ; 61.3,-56.5 78.3,-56.5 ; 69.8,-78.4 69.8,-36.7 ; 80.7,-51.5 97.7,-51.5 ; 89.2,-73.4 89.2,-31.7 ; 122.5,-51.5 139.5,-51.5 ; 131,-73.4 131,-31.7 ; 141.9,-56.5 158.9,-56.5 ; 150.4,-78.4 150.4,-36.7 ; 161.3,-56.5 178.3,-56.5 ; 169.8,-78.4 169.8,-36.7 ; 180.7,-56.5 197.7,-56.5 ; 189.2,-78.4 189.2,-36.7
Mechanical 4, Help:
  lines w0.1: 10,-74 10,-71 ; 15,0 15,-10 25,-10 25,0 ; 18,-5 22,-5 ; 20,-7 20,-3 ; 110,-74 110,-71 ; 195,0 195,-10 205,-10 205,0 ; 198,-5 202,-5 ; 200,-7 200,-3 ; 210,-74 210,-71
Mechanical 13:
  lines w0.2: 200,-78.5 220,-78.5 220,-36.5 200,-36.5 200,-78.5
  lines w0.3: 0,-65 220,-65 ; 0,-50 220,-50
  text "115ММ Общая" at 82,12.724 h2

## Text inside footprints (layer, text, board x,y; h text height)
XP1: Top Overlay, Top Silk "1" at 211.47,-3.555 h4 r270; Top Overlay, Top Silk "2" at 214.67,-3.455 h4 r270; Bottom Overlay, Bot Silk "1" at 211.97,-8.455 h2.5 r270; Bottom Overlay, Bot Silk "2" at 214.27,-8.555 h2.5 r270; Bottom Overlay, Bot Silk "20" at 214.37,-30.955 h2.5 r270; Bottom Overlay, Bot Silk "19" at 212,-30.75 h2.5 r270